# Altium PCB base_tiempo.PcbDoc
Units mil, origin at the board's own origin, x right, y up, seen from the top; angles counter-clockwise.
Board outline 3370 x 2100 mil, 2 copper layers (Top Layer, Bottom Layer); 28 components, 42 nets, 142 pads, 62 vias.
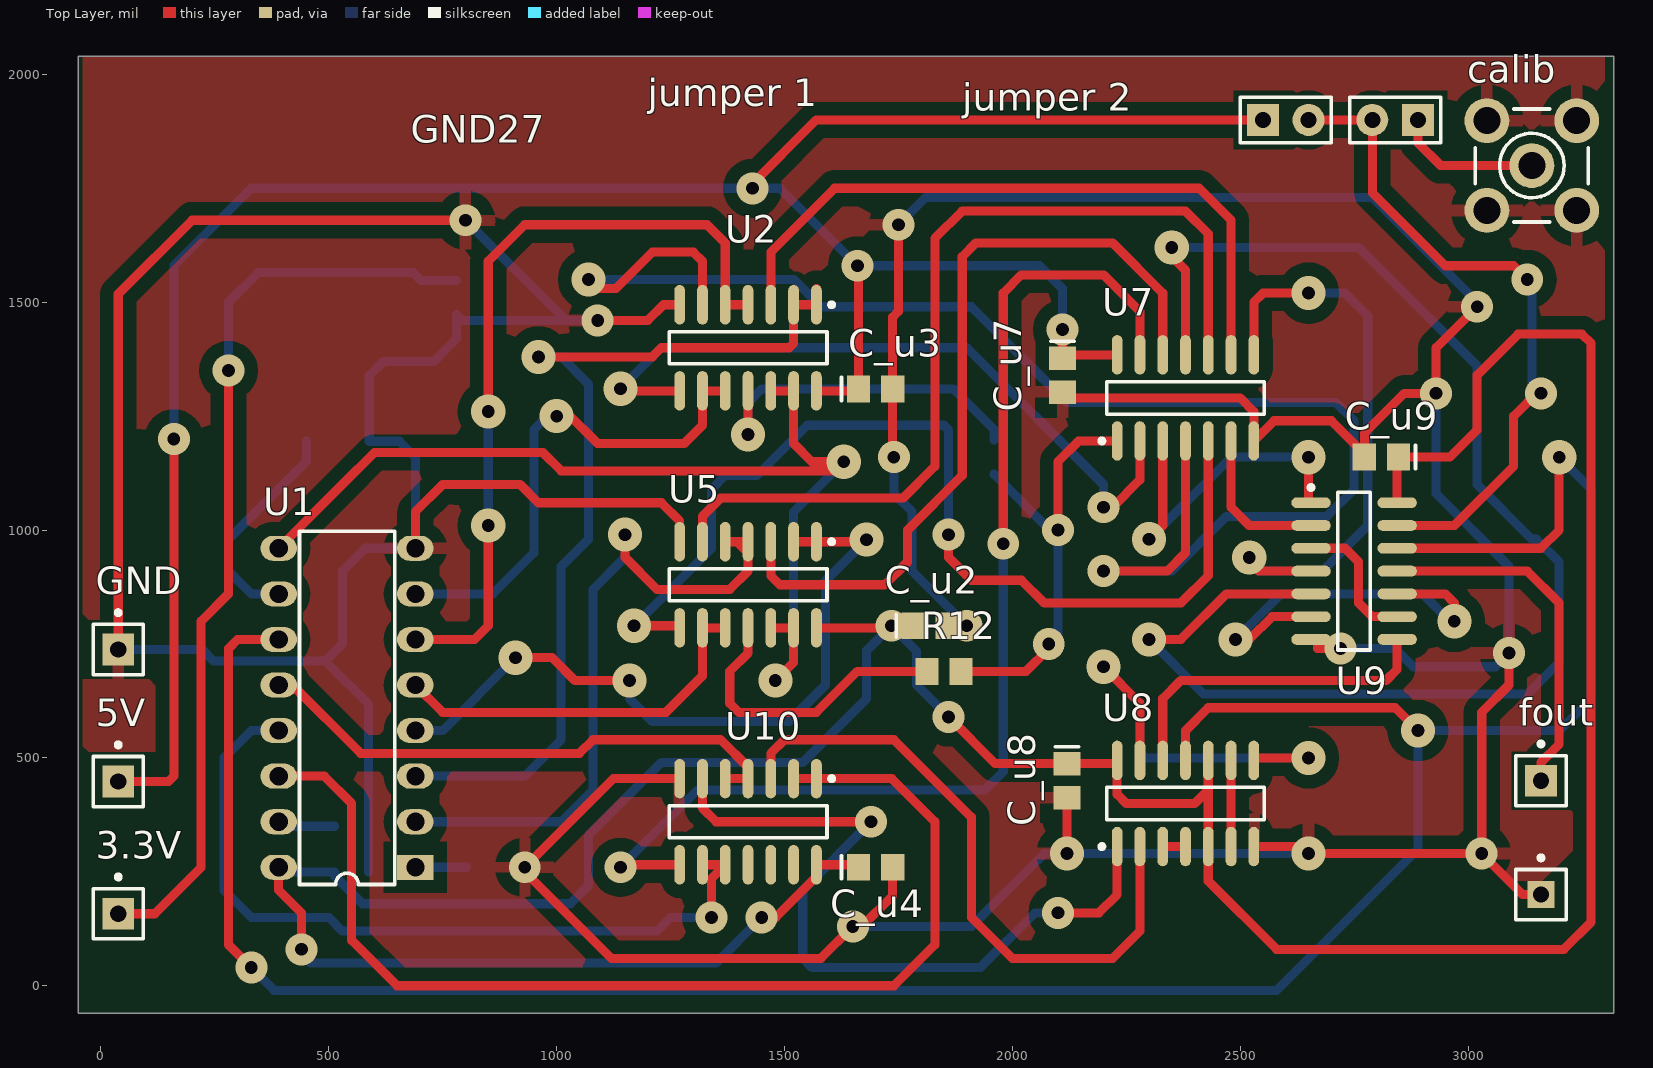
[diagram p0: Top Layer view]
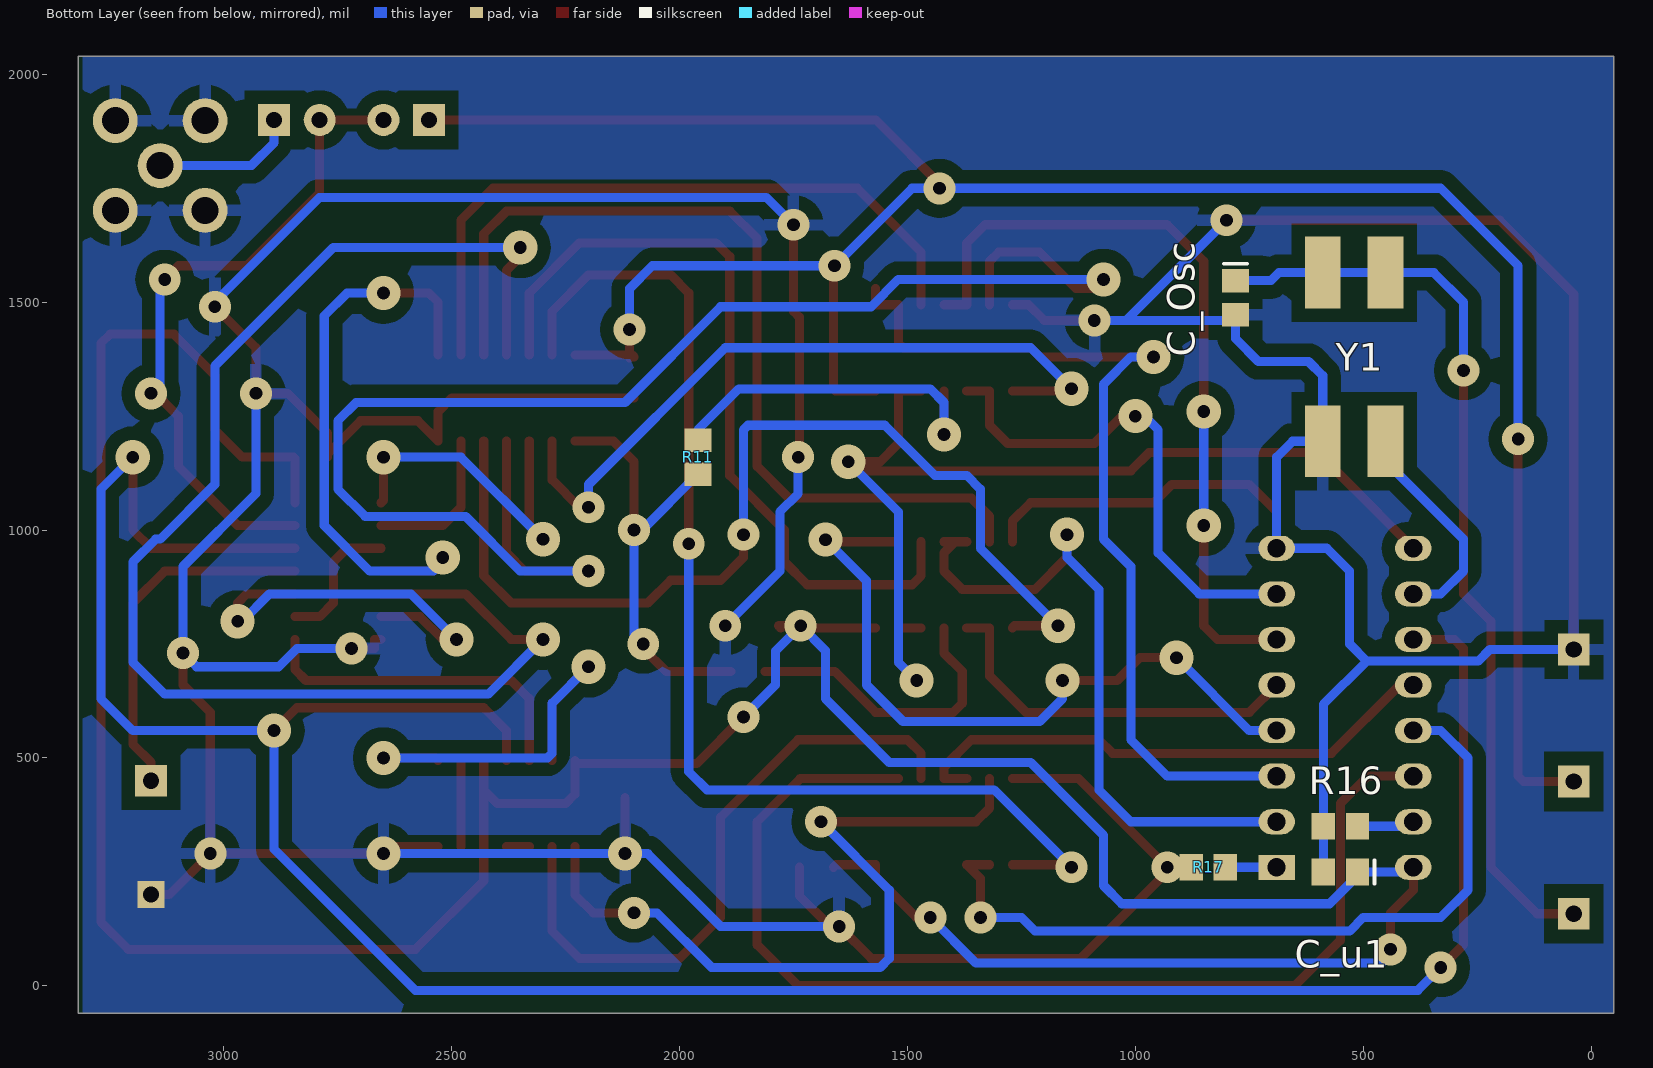
[diagram p1: Bottom Layer view, seen from below]

## Layer stack, top to bottom
Top Layer: signal copper 1.4
Dielectric: dielectric 12.6, FR-4, Dk 4.8
Bottom Layer: signal copper 1.4

## Board outline
-50,2040 -50,-60 3320,-60 3320,2040 -50,2040

## Design rules (kind name [scope] priority, off if disabled: settings)
Clearance Clearance_2 [InNamedPolygon('Top Layer') Or  InNamedPolygon('Bottom Layer')] p1: gap=30
Clearance Clearance_1 [InNamedPolygon('Top Layer')] p2: gap=30
Clearance [All] p3: gap=10
FabricationTestPointUsage TestPointUsage [All] p1: valid=0 allowmultiple=FALSE
FabricationTestpoint Testpoint [(IsPad And (OnTopLayer Or OnBottomLayer))] p1: side=3 testpointundercomponent=TRUE minsize=40 maxsize=100 preferedsize=60 minholesize=0 maxholesize=40 preferedholesize=32 testpointgrid=1 allowsidetop=TRUE allowsidebottom=TRUE usegrid=TRUE gridtolerance=0.01
PolygonConnect PolygonConnect_2 [All vs IsNamedPolygon('Bottom Layer') Or  IsNamedPolygon('Top Layer')] p1: connectstyle=Relief reliefconductorwidth=25 reliefentries=4 polygonreliefangle="90 Angle"
PolygonConnect PolygonConnect_1 [All vs IsNamedPolygon('Top Layer')] p2: connectstyle=Relief reliefconductorwidth=25 reliefentries=4 polygonreliefangle="90 Angle"
PolygonConnect [All] p3: connectstyle=Relief reliefconductorwidth=10 reliefentries=4 polygonreliefangle="90 Angle"
RoomDefinition AND_10_Entradas [InComponentClass('AND_10_Entradas')] p1: confinementstyle=ConfineIn formatcopy=TRUE lockcomponents=FALSE outline -470,-90 4270,-90 4270,2190 -470,2190
RoomDefinition Buffer_5Bits [InComponentClass('Buffer_5Bits')] p2: confinementstyle=ConfineIn formatcopy=TRUE lockcomponents=FALSE outline -680,-1490 4480,-1490 4480,2670 -680,2670
RoomDefinition base_tiempo [InComponentClass('base_tiempo')] p3: confinementstyle=ConfineIn formatcopy=TRUE lockcomponents=FALSE outline -860,-1260 4400,-1260 4400,2300 -860,2300
RoutingVias [All] p1: holewidth=28 width=70 viastyle="Through Hole" minholewidth=28 minwidth=70 maxholewidth=28 maxwidth=80
SilkscreenOverComponentPads [All] p1: minsilkscreentomaskgap=10
SolderMaskExpansion [All] p1: expansion=4
Width [All] p1: maxlimit=100 minlimit=10 preferedwidth=20
25 further rules are at their usual default settings.

## Classes and differential pairs
component class AND_10_Entradas: C_u7 C_u8 C_u9 U7 U8 U9
component class Buffer_5Bits: C_u2 C_u3 C_u4 R11 R12 U2 U5 U10
component class base_tiempo: 3.3V 5V C_Osc C_Osc1 C_u1 calib fout GND GND27 "jumper 1" "jumper 2" Pin Pout1 R16 R17 Sw_Start1 Sw_Stop1 U1 Y1

## Components (designator, comment, footprint, x,y, rotation, side; value= is the part's Value field where it differs from the comment)
3.3V "Socket" PIN1#1 38,158 r0 top
5V "Socket" PIN1#1 38,448 r0 top
C_Osc "Cap Pol3" C0805 780,1510 r270 bottom
C_u1 "Cap Pol3" C0805 550,250 r0 bottom
C_u2 "Cap Pol3" C0805 1820,790 r0 top
C_u3 "Cap Pol3" C0805 1700,1310 r0 top
C_u4 "Cap Pol3" C0805 1700,260 r0 top
C_u7 "Cap Pol3" C0805 2110,1340 r270 top
C_u8 "Cap Pol3" C0805 2120,450 r270 top
C_u9 "Cap Pol3" C0805 2810,1160 r180 top
calib "SMB" SMB_V-RJ45 3140,1800 r0 top
fout "Socket" PIN1#1 3160,450 r0 top
GND "Socket" PIN1#1 38,738 r0 top
GND27 "Socket" PIN1#2 3160,200 r0 top
"jumper 1" "Header 2" HDR1X2 2890,1900 r180 top
"jumper 2" "Header 2" HDR1X2 2550,1900 r0 top
R11 "Res Semi" 2012[0805] 1960,1160 r90 bottom
R12 "Res Semi" 2012[0805] 1850,690 r180 top
R16 "Res Semi" 2012[0805] 550,350 r0 bottom
R17 "Res Semi" 2012[0805] 840,260 r0 bottom
U1 "SN74HC4040N" N016 540,610 r90 top
U2 "SN74F00D" D014_N 1420,1400 r270 top
U5 "SN74F08D" D014_N 1420,880 r270 top
U7 "SN74F08D" D014_N 2380,1290 r90 top
U8 "SN74F08D" D014_N 2380,400 r90 top
U9 "SN74F08D" D014_N 2750,910 r0 top
U10 "SN74F08D" D014_N 1420,360 r270 top
Y1 "ECS-240-20-7M" ECX-3M 520,1380 r270 bottom

## Footprints (in the part's own frame and the unit in brackets; to place one, negate y for a bottom-side part, rotate by r counter-clockwise, add the part's x,y. Pads: shape width x height; smd on the part's side, far side on the other; paste and mask are expansions set on the pad)
2012[0805] [mm] "Chip Resistor; Body 2.0 x 1.3 mm (LxW typ)"
  rect 1.3x1.5 smd: 1(-0.95,0) 2(0.95,0)
C0805 [mm] "Chip Capacitor; Body 2.0 x 1.2 mm (LxW typ)"
  rect 1.3x1.5 smd: 1(-0.95,0) 2(0.95,0)
  silkscreen extent -1.9,-0.65 -1.9,0.65
D014_N [mm] "SOIC, 14-Leads, Body 8.7x3.9mm, Pitch 1.27mm, IPC Medium Density"
  oval 2.2x0.6 smd: 1(-2.4,3.81) 2(-2.4,2.54) 3(-2.4,1.27) 4(-2.4,0) 5(-2.4,-1.27) 6(-2.4,-2.54) 7(-2.4,-3.81) 8(2.4,-3.81) 9(2.4,-2.54) 10(2.4,-1.27) 11(2.4,0) 12(2.4,1.27) 13(2.4,2.54) 14(2.4,3.81)
  silkscreen extent -2.52,-4.4 0.9,4.79, body extent -1.95,-4.33 1.95,4.33, height 1.75
ECX-3M [mm] "Quartz Crystal, SM; 4 Leads; Body 13 x 4.7 x 4.2 mm (LxWxH)"
  rect 4x2 smd: 1(-4.7,-1.75) 2(4.7,-1.75) 3(4.7,1.75) 4(-4.7,1.75)
HDR1X2 [mil] "Connector; Header; 2 Position"
  rect 70x70 hole 35.43: 1(0,0)
  round 70 hole 35.43: 2(100,0)
  silkscreen extent -50,-50 150,50
N016 [mil] "DIP; 16 Leads; Row Spacing 7.62 mm; Pitch 2.54 mm"
  rect 55x80 hole 40: 1(-350,-150)
  oval 55x80 hole 40: 2(-250,-150) 3(-150,-150) 4(-50,-150) 5(50,-150) 6(150,-150) 7(250,-150) 8(350,-150) 9(350,150) 10(250,150) 11(150,150) 12(50,150) 13(-50,150) 14(-150,150) 15(-250,150) 16(-350,150)
  silkscreen extent -388,-104 388,104
PIN1#1 [mil] "Connector; Plug"
  rect 70x70 hole 35.43: 1(0,0)
  silkscreen extent -55,-55 55,86
PIN1#2 [mil] "Connector; Plug"
  rect 59.06x59.06 hole 35.43: 1(0,0)
  silkscreen extent -55,-55 55,86
SMB_V-RJ45 [mm] "Connector; SMB Straight"
  round 2.5 hole 1.5: 1(0,0) 2(-2.5,-2.5) 2(-2.5,2.5) 2(2.5,-2.5) 2(2.5,2.5)
  silkscreen extent -3.15,-3.15 3.15,3.15

## Part data
C_Osc C_u1 C_u2 C_u3 C_u4 C_u7 C_u8 C_u9: "Polarized Capacitor (Surface Mount)"
calib: "SMB Straight Connector"
"jumper 1" "jumper 2": "Header, 2-Pin"
R11 R12 R16 R17: "Semiconductor Resistor"
U1: "12-Bit Asynchronous Binary Counter"
U2: "Quadruple 2-Input Positive-NAND Gate"
U5 U7 U8 U9 U10: "Quadruple 2-Input Positive-AND Gate"
Y1: "Crystal Oscillator"

## Via types
v1: diameter 70, hole 28, Top Layer to Bottom Layer, 34 vias
v2: diameter 75, hole 28, Top Layer to Bottom Layer, 28 vias

## Nets (pads, with @x,y where several pads share a name; then routed paths per layer and width w, separated by ;. In a path a pad name is that pad's centre, name@x,y a point inside that pad or via, vN(x,y) a via of type N, cw(c..) or ccw(c..) an arc to the next point about the centre after c; other vN are vias at no path point)
3.3V: 3.3V.1 C_Osc.1 Y1.1 Y1.4 | length 2023.3
  Top Layer w20: 3.3V.1 118,158 220,260 220,800 280,860 v1(280,1350)
  Bottom Layer w20: v1(280,1350) 280,1500 345.04,1565.04 Y1.4 Y1.1 684.96,1565.04 702.6,1547.4 C_Osc.1
10KHZ: U1.11 U8.11 U9.12 | length 5928
  Top Layer w20: v1@335,45 325,45 280,90 280,740 300,760 U1.11 ; U8.11 2380,560 2430,610 2840,610 v2(2890,560) ; U9.12 3160,960 3200,1000 v2(3200,1160)
  Bottom Layer w20: v1(330,40) 380,-10 2580,-10 2890,300 v2(2890,560) 3200,560 3270,630 3270,1090 v2(3200,1160)
AND0: U7.3 U9.1 | length 754.8
  Top Layer w20: v2(2300,980) 2330,1010 U7.3 ; v2(2650,1160) 2650,1065.51 U9.1
  Bottom Layer w20: v2(2300,980) 2480,1160 v2(2650,1160)
AND1: U7.6 U9.2 | length 337.6
  Top Layer w20: U7.6 2480,1050 2520,1010 U9.2
AND2: U9.3 U9.9 | length 303.8
  Top Layer w20: U9.3 2730,960 2760,930 2760,840 2790,810 U9.9
AND3: U7.8 U9.4 | length 1251.4
  Top Layer w20: U7.8 2530,1500 2550,1520 v2(2650,1520) ; v2@2540,910 U9.4
  Bottom Layer w20: v2@2540,910 2680,910 2780,1010 2780,1470 2730,1520 v2(2650,1520)
  other v2: 2520,940
AND4: U7.11 U9.5 | length 3140
  Top Layer w20: v2(2300,760) 2370,760 2470,860 U9.5 ; v2(2350,1620) 2350,1600 2380,1570 U7.11
  Bottom Layer w20: v2(2300,760) 2420,640 3070,640 3130,640 3200,710 3200,930 3150,980 3140,980 3020,1100 3020,1360 2760,1620 2370,1620 v2@2350,1600
AND5: U9.6 U9.10 | length 906.3
  Top Layer w20: v2(2490,760) 2520,760 2570,810 U9.6 ; U9.10 2950,860 2970,840 v2(2970,800)
  Bottom Layer w20: v2(2490,760) 2590,860 2900,860 2960,800 v2(2970,800)
AND6: U8.12 U9.8 | length 742.2
  Top Layer w20: U8.12 2330,630 2370,670 2820,670 2844.49,694.49 U9.8
AND7: U8.3 U8.4 | length 50
  Top Layer w20: U8.3 U8.4
AND8: U8.6 U8.9 | length 189
  Top Layer w20: U8.6 U8.9
AND9: U8.8 U8.13 | length 958.2
  Top Layer w20: v2(2200,700) 2280,620 U8.13 ; U8.8 2535.51,500 v2(2650,500)
  Bottom Layer w20: v2(2200,700) 2280,620 2280,510 2290,500 v2(2650,500)
C0: U1.9 U2.12 U2.13 U5.12 U5.13 | length 2382.3
  Top Layer w20: U1.9 540,1110 ; 530,1100 600,1170 970,1170 1010,1130 1610,1130 v2(1630,1150) 1560,1150 1520,1190 U2.13 U2.12 ; U5.12 U5.13 1520,710 v2(1480,670)
  Bottom Layer w20: v2(1480,670) 1520,710 1520,1040 v2(1630,1150)
C1: U1.7 U2.9 U2.10 | length 1124.9
  Top Layer w20: v2(1000,1250) 1010,1260 1020,1260 1090,1190 1280,1190 1320,1230 U2.9 U2.10
  Bottom Layer w20: U1.7 860,860 950,950 950,1220 980,1250 v2(1000,1250)
C2: U1.6 U2.4 U2.5 | length 1707.6
  Top Layer w20: U1.6 820,760 850,790 v2(850,1010) ; v2(850,1260) 850,1590 930,1670 1330,1670 1370,1630 U2.5 U2.4
  Bottom Layer w20: v2@850,1030 v2(850,1260)
C3: U1.5 U5.9 U5.10 | length 843.5
  Top Layer w20: U1.5 750,600 1240,600 1320,680 U5.9 U5.10
C4: U1.3 U2.1 U2.2 | length 2035.3
  Top Layer w20: v2(960,1380) 1210,1380 1230,1400 1510,1400 1520,1410 U2.2 U2.1 U2.1@1570,1530
  Bottom Layer w20: U1.3 930,460 1010,540 1010,920 1070,980 1070,1320 1010,1380 v2(960,1380)
C5: U1.2 U5.4 U5.5 | length 1493.7
  Top Layer w20: v2(1150,990) 1150,940 1220,870 1380,870 1420,910 1420,950 1395.51,974.49 U5.5 ; 1400,974.49 U5.4
  Bottom Layer w20: U1.2 1010,360 1080,430 1080,870 1150,940 v2(1150,990)
C6: U1.4 U5.1 U5.2 | length 1601.9
  Top Layer w20: v2(910,720) 990,720 1040,670 v2(1160,670) ; U5.2 U5.1 1675.51,974.49 v2(1680,978.98)
  Bottom Layer w20: U1.4 750,560 905,715 v2@915,715 ; v2(1160,670) 1160,630 1210,580 1510,580 1590,660 1590,888.98 v2(1680,978.98)
C7: U1.13 U10.9 U10.10 | length 1732.5
  Top Layer w20: U10.9 U10.10 1340,235.51 v1(1340,150)
  Bottom Layer w20: U1.13 330,560 270,500 270,210 330,150 500,150 530,120 1220,120 1250,150 v1(1340,150)
C8: U1.12 U10.4 U10.5 | length 1204.9
  Top Layer w20: U1.12 420,660 570,510 1050,510 1080,540 1360,540 1420,480 U10.4 U10.5
C9: U1.14 U10.1 U10.2 | length 2472.7
  Top Layer w20: U1.14 490,460 550,400 550,100 650,0 1740,0 1830,90 1830,360 1735.51,454.49 U10.1@1560,454.49 ; U10.2 U10.1
CLK: U1.10 Y1.3 | length 486.5
  Bottom Layer w20: U1.10 330,860 280,910 280,980 451.1,1151.1 Y1.3
GND: C_Osc.2 C_u1.2 C_u2.2 C_u3.2 C_u4.2 C_u7.2 C_u8.2 C_u9.2 calib.2 GND27.1 GND.1 R16.2 R17.2 U1.8 U2.7 U5.7 U7.7 U8.7 U9.7 U10.7 Y1.2 | length 13832.4
  Top Layer w20: GND.1 38,1518 200,1680 v1(800,1680) ; U1.8 690,1040 750,1100 920,1100 960,1060 1230,1060 1270,1020 U5.7 ; v1(1090,1460) 1200,1460 1234.49,1494.49 U2.7 ; U10.7 1124.49,454.49 v1(930,260) 930,250 1120,60 1580,60 v1(1650,130) 1670,130 1737.4,197.4 C_u4.2 ; v1@1750,1150 1750,1160 1737.4,1172.6 C_u3.2 1737.4,1467.4 1750,1480 v1(1750,1670) ; C_u7.2@2100,1290 2500,1290 2530,1260 U7.7 2574.49,1240 2700,1240 C_u9.2@2772.6,1167.4 ; v2(2120,290) C_u8.2 ; U8.7 2634.49,305.51 v2(2650,290) v1(3030,290) ; U9.7 2670,760 2670,740 v1(2720,740) ; C_u9.2 C_u9.2@2772.6,1167.4 ; v1(3020,1490) 2930,1400 v1(2930,1300) 2860,1300 2772.6,1212.6 C_u9.2@2772.6,1167.4 ; v1@3030,300 v1(3030,290) ; v1(3090,730) 3090,660 3030,600 v1(3030,290) ; GND27.1 3120,200 v1(3030,290)
  Bottom Layer w20: GND.1 222,738 247.5,712.5 492.5,712.5 ; C_u1.2 R16.2 587.4,617.6 492.5,712.5 ; v1(800,1680) 1020,1460 ; v1(1090,1460) 1020,1460 ; v1(1650,130) 1910,130 2070,290 v2(2120,290) v2(2650,290) ; v1(1740,1160) 1740,1080 1780,1040 1780,910 v1(1900,790) ; v1(1750,1670) 1810,1730 2790,1730 3020,1500 v1(3020,1490) ; v1(2720,740) 2840,740 2880,700 3060,700 v1(3090,730) 3090,920 2930,1080 v1(2930,1300) ; v1@3020,290 v1(3030,290) ; 492.5,712.5 530,750 530,910 580,960 U1.8 690,1160 655.04,1194.96 Y1.2 588.9,1338.9 620,1370 730,1370 780,1420 C_Osc.2 792.6,1460 1020,1460
Netcalib_1: "jumper 1.1" calib.1 | length 641.4
  Top Layer w20: 2890,1900 2890,1850 2940,1800 calib.1
  Bottom Layer w20: 2890,1900 2890,1850 2940,1800 calib.1
Netfout_1: fout.1 U9.11 | length 791.1
  Top Layer w20: U9.11 3130,910 3200,840 3200,530 3160,490 fout.1
"Netjumper 1_2": "jumper 1.2" "jumper 2.2" U9.13 | length 1495.3
  Top Layer w20: 2650,1900 2790,1900 2790,1740 2950,1580 3100,1580 v1(3130,1550) ; U9.13 2970,1010 3100,1140 3100,1250 3160,1310 v1(3160,1300)
  Bottom Layer w20: v1(3130,1550) 3140,1540 3140,1320 v1(3160,1300)
NetR11_2: R11.2 U2.11 | length 797.8
  Top Layer w20: v2@1420,1200 v2(1420,1210) U2.11
  Bottom Layer w20: v2@1420,1200 v2(1420,1210) 1420,1280 1450,1310 1870,1310 1960,1220 R11.2
NetR12_2: R12.2 U5.11 | length 660.2
  Top Layer w20: U5.11 1420,730 1380,690 1380,620 1400,600 1570,600 1660,690 R12.2
NetR16_1: R16.1 U1.15 | length 126.7
  Bottom Layer w20: U1.15 400,350 R16.1
NetR17_1: R17.1 U1.1 | length 112.6
  Bottom Layer w20: U1.1 R17.1
Q0: R11.1 R12.1 U7.1 | length 971.2
  Top Layer w20: R12.1 2030,690 2080,740 v1(2080,750) ; v1(2100,1000) 2100,1150 2145.51,1195.51 U7.1
  Bottom Layer w20: R11.1 2082.6,1000 v1(2100,1000) 2100,770 v1(2080,750)
Q1: U2.8 U7.2 | length 1602.7
  Top Layer w20: v2(1140,1310) 1135.51,1305.51 U2.8 ; v1(2200,1050) 2220,1050 2280,1110 U7.2
  Bottom Layer w20: v2(1140,1310) 1230,1400 1900,1400 2200,1100 v1(2200,1050)
Q2: U2.6 U7.4 | length 3420.3
  Top Layer w20: v2(1070,1550) 1090,1530 1130,1530 1210,1610 1300,1610 1320,1590 U2.6 ; v1(2200,910) 2340,910 2380,950 U7.4
  Bottom Layer w20: v2(1070,1550) 1520,1550 1580,1490 1910,1490 2120,1280 2710,1280 2750,1240 2750,1090 2690,1030 2470,1030 2350,910 v1(2200,910)
Q3: U5.8 U7.5 | length 2284.5
  Top Layer w20: v2(1170,790) 1265.51,790 U5.8 ; v1(1860,990) 1860,940 1910,890 2020,890 2070,840 2370,840 2430,900 U7.5
  Bottom Layer w20: v2(1170,790) 1340,960 1340,1090 1370,1120 1440,1120 1550,1230 1850,1230 1860,1220 1860,1000 v1@1880,980
Q4: U2.3 U7.9 | length 1508
  Top Layer w20: U2.3 1470,1610 1610,1750 2410,1750 2480,1680 U7.9
Q5: U5.6 U7.10 | length 2022.2
  Top Layer w20: U5.6 1320,1030 1360,1070 1760,1070 1830,1140 1830,1640 1890,1700 2380,1700 2430,1650 U7.10
Q6: U5.3 U7.12 | length 1756.7
  Top Layer w20: U5.3 1470,900 1490,880 1720,880 1770,930 1770,1000 1890,1120 1890,1600 1920,1630 2220,1630 2330,1520 U7.12
Q7: U7.13 U10.8 | length 2554.5
  Top Layer w20: v1(1140,260) 1145.51,265.51 U10.8 ; v1(1980,970) 1980,1520 2020,1560 2200,1560 2280,1480 U7.13
  Bottom Layer w20: v1(1140,260) 1310,430 1940,430 1980,470 v1(1980,970)
Q8: U8.1 U10.6 | length 1672
  Top Layer w20: U10.6 1320,390 1350,360 v1(1690,360) ; v1(2100,160) 2190,160 2230,200 U8.1
  Bottom Layer w20: v1@1685,355 1540,210 1540,60 1560,40 1930,40 2050,160 v1(2100,160)
Q9: U8.2 U10.3 | length 1416
  Top Layer w20: U10.3 1470,510 1500,540 1740,540 1910,370 1910,150 2000,60 2140,60 2220,60 2280,120 U8.2
VCC: 5V.1 "jumper 2.1" C_u1.1 C_u2.1 C_u3.1 C_u4.1 C_u7.1 C_u8.1 C_u9.1 U1.16 U2.14 U5.14 U7.14 U8.5 U8.10 U8.14 U9.14 U10.14 | length 12878.1
  Top Layer w20: 5V.1 148,448 160,460 v1(160,1200) ; U1.16 390,210 440,160 v1(440,80) ; v1(1430,1750) 1420,1750 1570,1900 2550,1900 ; v1(1450,150) 1480.97,150 1570,239.03 U10.14 1657.09,265.51 C_u4.1 ; U5.14 v1@1734.49,785.51 ; U2.14 1658.11,1305.51 C_u3.1 1662.6,1577.4 v1(1660,1580) ; v1(1734.49,790) C_u2.1 C_u2.1@1778.11,785.51 ; v1(1860,590) 1962.6,487.4 C_u8.1 2222.91,487.4 U8.14 2230,420 2250,400 2400,400 2430,430 ; C_u7.1@2100,1380 2104.49,1384.49 U7.14 ; C_u7.1 v1(2110,1440) ; U8.10 2430,430 ; U9.14 2844.49,1157.09 C_u9.1 2960,1160 3020,1220 3020,1340 3110,1430 3250,1430 3270,1410 3270,140 3210,80 2580,80 2430,230 U8.5 2430,430
  Bottom Layer w20: v1(160,1200) 160,1580 330,1750 1490,1750 v1(1660,1580) 2060,1580 2110,1530 v1(2110,1440) ; U1.16 400,250 C_u1.1 512.6,241.4 574,180 1030,180 1070,220 1070,330 1230,490 1540,490 1680,630 1680,735.51 v1(1734.49,790) 1790,734.49 1790,660 v1(1860,590) ; v1(440,80) 440,70 460,50 1350,50 v1(1450,150)
pads on no net: U10.11 U10.12 U10.13

## Polygon pours and split planes (outlines as drawn)
GND on Top Layer "Top Layer" (solid, remove dead copper, pour order 1000): -40,2040 -40,-60 3300,-60 3300,2040 -40,2040
GND on Bottom Layer "Bottom Layer" (solid, remove dead copper, pour order 1001): -50,2040 -50,-60 3310,-60 3310,2040 -50,2040

## Silkscreen, mask and mechanical layers (free items; w line width, h text height)
Mechanical 1:
  the board outline again, w30